# Altium PCB SPACER_2.PcbDoc
Units mm, origin at the board's own origin, x right, y up, seen from the top; angles counter-clockwise.
Board outline 22 x 22 mm, 2 copper layers (Top Layer, Bottom Layer), stack 1.571 mm thick; 1 components, 4 nets, 22 pads, 0 vias.
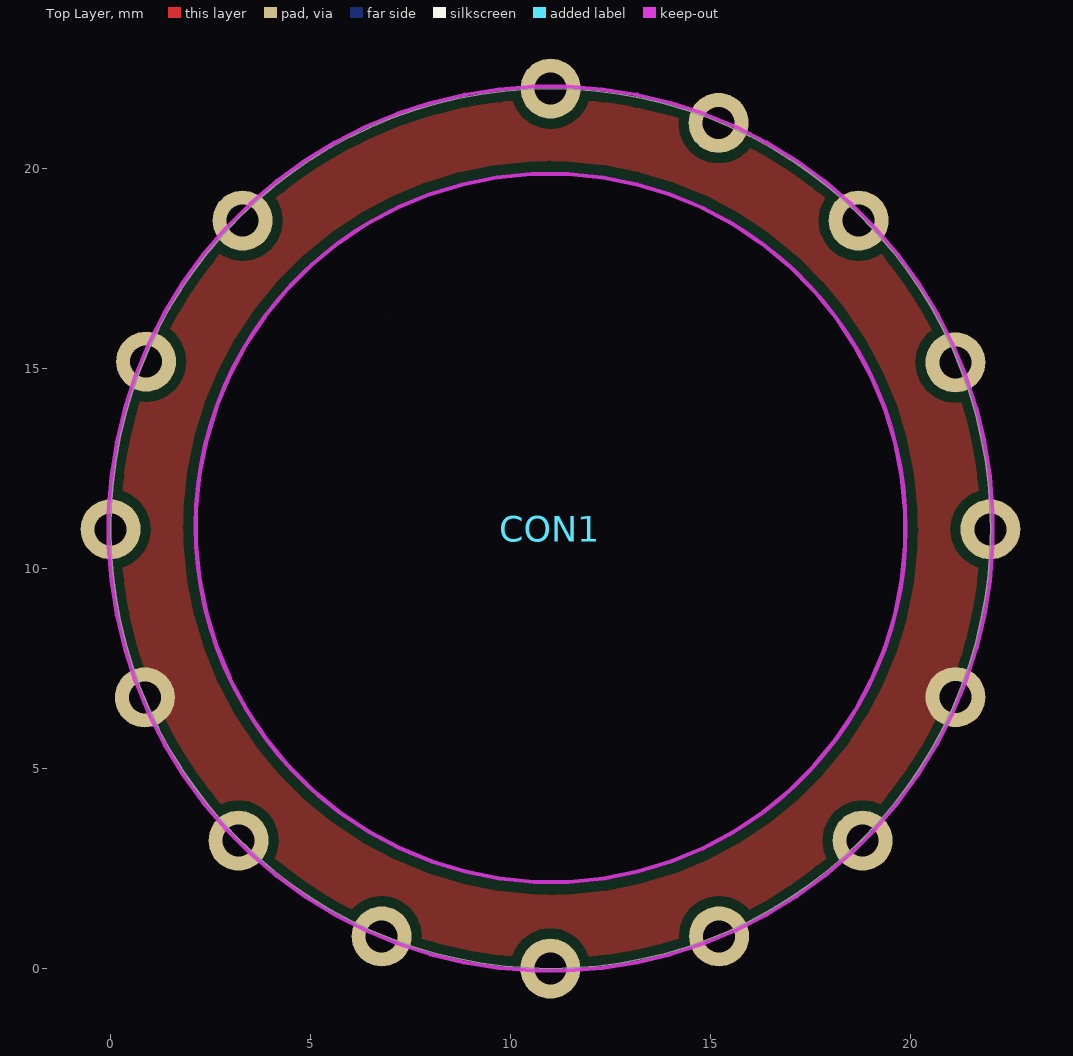
[diagram p0: Top Layer view]
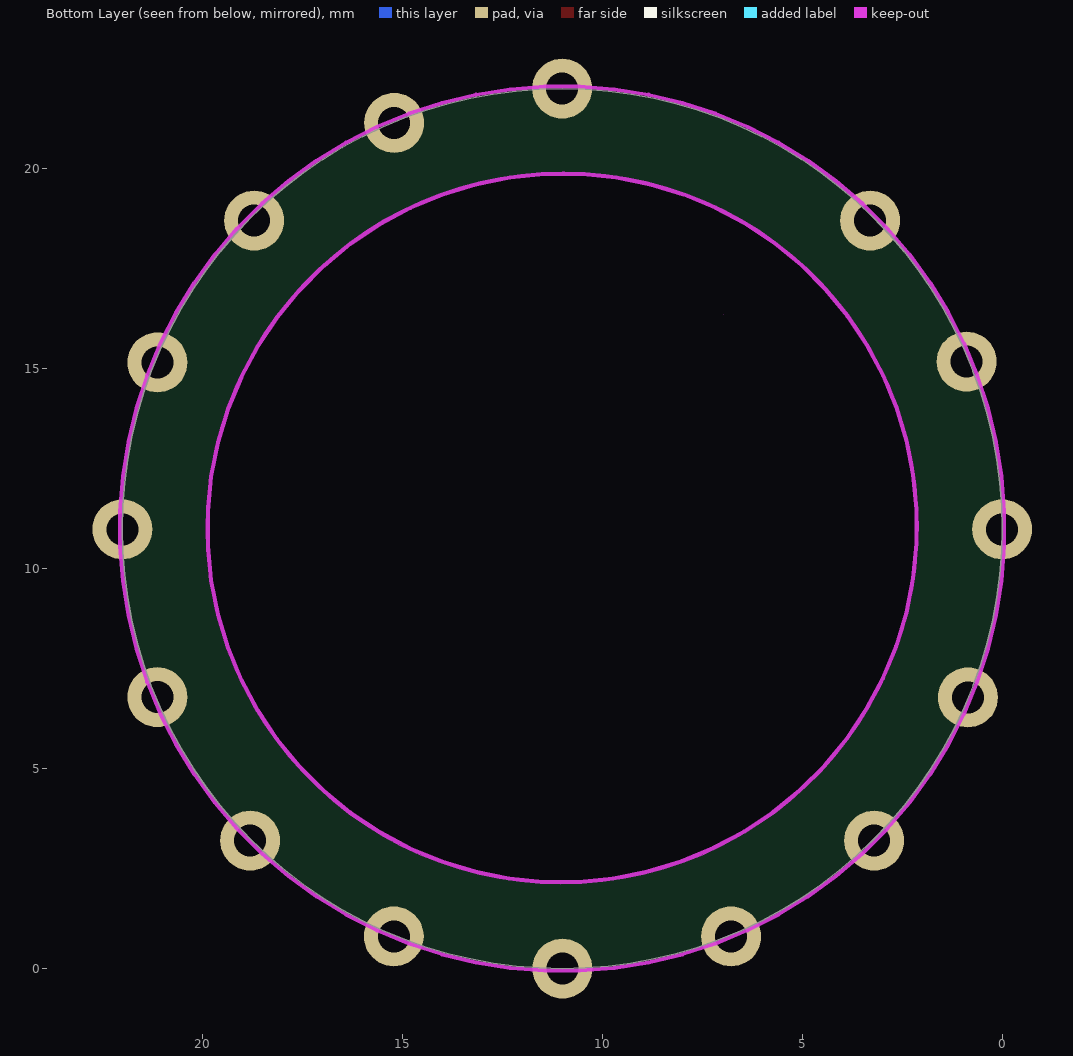
[diagram p1: Bottom Layer view, seen from below]

## Layer stack, top to bottom
Top Solder: solder mask 0.0102, Solder Resist, Dk 3.5
Top Layer: signal copper 0.0356
Dielectric 1: dielectric 1.5, FR-4, Dk 4.8
Bottom Layer: signal copper 0.0356
Bottom Solder: solder mask 0.0102, Solder Resist, Dk 3.5

## Board outline
11,0 cw(c11,11) 0,11 cw(c11,11) 11,22 cw(c11,11) 22,11 cw(c11,11)
cut-out: 11,19.91 cw(c11,11) 19.91,11 cw(c11.03,11) 11.03,2.12 cw(c11.03,11.06) 2.09,11.06 cw(c10.94,11.06) 10.94,19.91
cut-out: 6.97,16.34

## Design rules (kind name [scope] priority, off if disabled: settings)
Clearance [All] p1: gap=0.254 ignorepadtopadclearanceinfootprint=FALSE except(0: Arc-Hole Track-Hole SMDPad-Hole THPad-Hole Via-Hole Fill-Hole Poly-Hole Region-Hole Text-Hole)
PolygonConnect [All] p1: connectstyle=Direct reliefconductorwidth=0.254 reliefentries=4 polygonreliefangle="90 Angle" airgapwidth=0.254
RoutingVias [All] p1: holewidth=0.711 width=1.27 viastyle="Through Hole" minholewidth=0.711 minwidth=1.27 maxholewidth=0.711 maxwidth=1.27
SolderMaskExpansion [All] p1: expansion=0.102
Width [All] p1: maxlimit=0.254 minlimit=0.254 preferedwidth=0.254
30 further rules are at their usual default settings.

## Components (designator, comment, footprint, x,y, rotation, side; value= is the part's Value field where it differs from the comment)
CON1 "Between PCB connection" SmartParks_Rhino 11,11 r0 top locked

## Footprints (in the part's own frame and the unit in brackets; to place one, negate y for a bottom-side part, rotate by r counter-clockwise, add the part's x,y. Pads: shape width x height; smd on the part's side, far side on the other; paste and mask are expansions set on the pad)
SmartParks_Rhino [mm]
  round 1.5 hole 0.8: 1(0,11) 2(4.199,10.142) 3(7.7,7.7) 4(10.119,4.153) 5(10.993,-0.017) 6(10.122,-4.212) 7(7.8,-7.8) 8(4.211,-10.193) 9(-0.007,-11) 10(-4.222,-10.197) 11(-7.8,-7.8) 12(-10.143,-4.22) 13(-11,-0.017) 14(-10.11,4.176) 15(-7.7,7.7)

## Part data
CON1: library part SmartParks_Rhino

## Free pads (board coordinates)
  round 0.25 hole 0.8 unplated: 16(4.04,1.5) 16(4.967,0.9) 16(5.047,21.097) 16(22.37,7.99) 16(22.64,9.1) 17(6.025,21.607) 18(6.997,22.027)

## Nets (pads, with @x,y where several pads share a name; then routed paths per layer and width w, separated by ;. In a path a pad name is that pad's centre, name@x,y a point inside that pad or via, vN(x,y) a via of type N, cw(c..) or ccw(c..) an arc to the next point about the centre after c; other vN are vias at no path point)
GND: CON1.6 CON1.12
VBAT: CON1.14
VGPS: CON1.13
VMCU: CON1.5
pads on no net: CON1.1 CON1.2 CON1.3 CON1.4 CON1.7 CON1.8 CON1.9 CON1.10 CON1.11 CON1.15

## Polygon pours and split planes (outlines as drawn)
GND on Top Layer "Top Layer-GND" (solid, pour order 0): 11,22 cw(c11,11.007) 21.993,11.007 cw(c10.986,11.007) 10.986,0 cw(c10.986,10.986) 0,10.986 0,11 cw(c11,11)

## Keep-outs
Keep-Out Layer:
  lines w0.1: -0.05,10.564 cw(c0,10.568) -0.05,10.568 ; -0.05,10.564 -0.05,10.564 cw(c0,10.568) -0.05,10.568 ; -0.05,10.564 0.018,9.702 ; -0.05,10.568 -0.05,11 -0.05,11.432 ; -0.05,11.432 cw(c0,11.432) -0.05,11.436 ; -0.05,11.432 cw(c0,11.432) -0.05,11.436 -0.05,11.436 ; -0.05,11.436 0.018,12.298 ; 0.018,9.702 ccw(c0.068,9.706) 0.018,9.698 ; 0.018,9.702 ccw(c0.068,9.706) 0.018,9.698 ; 0.018,9.702 0.018,9.702 ; 0.018,12.298 cw(c0.068,12.294) 0.018,12.302 ; 0.018,12.298 cw(c0.068,12.294) 0.018,12.302 ; 0.018,12.298 0.018,12.298 ; 0.018,9.698 0.154,8.845 ; 0.018,12.302 0.154,13.155 ; 0.154,8.845 ccw(c0.203,8.852) 0.154,8.841 ; 0.154,8.845 ccw(c0.203,8.852) 0.154,8.841 ; 0.154,13.155 cw(c0.203,13.148) 0.154,13.159 ; 0.154,13.155 cw(c0.203,13.148) 0.154,13.159 ; 0.154,8.841 0.356,8 ; 0.154,13.159 0.356,14 ; 0.357,7.997 ccw(c0.405,8.012) 0.357,7.996 ; 0.357,7.997 cw(c0.405,8.012) 0.356,8 ; 0.357,7.997 0.357,7.996 ; 0.356,8 ccw(c0.405,8.012) 0.357,7.996 ; 0.356,14 cw(c0.405,13.988) 0.357,14.003 ; 0.356,14 cw(c0.405,13.988) 0.357,14.004 ; 0.357,14.003 cw(c0.405,13.988) 0.357,14.004 ; 0.357,14.003 0.357,14.004 ; 0.357,7.996 0.357,7.996 ; 0.357,7.996 0.624,7.174 ; 0.357,14.004 0.624,14.826 ; 0.357,14.004 0.357,14.004 ; 0.624,7.174 ccw(c0.672,7.19) 0.626,7.171 ; 0.624,7.174 ccw(c0.672,7.19) 0.624,7.174 ; 0.624,7.174 ccw(c0.672,7.19) 0.626,7.171 ; 0.624,7.174 0.624,7.174 ; 0.624,7.174 0.624,7.174 ; 0.624,14.826 cw(c0.672,14.81) 0.626,14.829 ; 0.624,14.826 ccw(c0.672,14.81) 0.624,14.826 ; 0.624,14.826 cw(c0.672,14.81) 0.626,14.829 ; 0.624,14.826 0.624,14.826 ; 0.624,14.826 0.624,14.826 ; 0.626,7.171 0.956,6.372 ; 0.626,14.829 0.956,15.628 ; 0.956,6.372 ccw(c1.003,6.391) 0.958,6.368 ; 0.956,6.372 ccw(c1.003,6.391) 0.958,6.368 ; 0.956,15.628 cw(c1.003,15.609) 0.958,15.632 ; 0.956,15.628 cw(c1.003,15.609) 0.958,15.632 ; 0.958,6.368 0.958,6.368 ; 0.958,6.368 1.35,5.599 ; 0.958,15.632 1.35,16.401 ; 0.958,15.632 0.958,15.632 ; 1.351,5.598 ccw(c1.395,5.621) 1.352,5.595 ; 1.35,5.599 ccw(c1.395,5.621) 1.352,5.595 ; 1.35,5.599 1.351,5.598 ; 1.351,16.402 cw(c1.395,16.379) 1.352,16.405 ; 1.35,16.401 cw(c1.395,16.379) 1.352,16.405 ; 1.35,16.401 1.351,16.402 ; 1.352,5.595 1.804,4.858 ; 1.352,16.405 1.804,17.142 ; 1.804,4.858 ccw(c1.847,4.884) 1.806,4.855 ; 1.804,4.858 ccw(c1.847,4.884) 1.806,4.855 ; 1.804,17.142 cw(c1.847,17.116) 1.806,17.145 ; 1.804,17.142 cw(c1.847,17.116) 1.806,17.145 ; 1.806,4.855 2.314,4.155 ; 1.806,17.145 2.314,17.845 ; 2.14,11.06 ccw(c2.09,11.06) 2.14,11.06 ; 2.14,11.06 ccw(c2.09,11.06) 2.14,11.06 ; 2.14,11.06 ccw(c2.09,11.06) 2.14,11.06 ; 2.14,11.06 ccw(c2.09,11.06) 2.14,11.06 ; 2.14,11.06 2.14,11.492 2.225,12.353 2.393,13.201 2.644,14.028 2.975,14.827 3.383,15.59 3.863,16.308 4.412,16.977 5.023,17.588 5.692,18.137 6.41,18.617 7.173,19.025 7.972,19.356 8.799,19.607 9.647,19.775 10.508,19.86 10.94,19.86 ; 2.14,11.06 2.14,11.06 ; 2.14,11.06 2.14,10.623 2.226,9.754 2.396,8.897 2.65,8.061 2.984,7.254 3.396,6.484 3.881,5.758 4.435,5.083 5.053,4.465 5.728,3.911 6.454,3.426 7.224,3.014 8.031,2.68 8.867,2.426 9.724,2.256 10.593,2.17 11.03,2.17 ; 2.14,11.06 2.14,11.06 ; 2.314,4.155 ccw(c2.355,4.185) 2.317,4.152 ; 2.314,4.155 ccw(c2.355,4.185) 2.317,4.152 ; 2.314,17.845 cw(c2.355,17.815) 2.317,17.848 ; 2.314,17.845 cw(c2.355,17.815) 2.317,17.848 ; 2.317,4.152 ccw(c2.355,4.185) 2.317,4.152 ; 2.317,4.152 2.317,4.152 ; 2.317,4.152 2.317,4.152 ; 2.317,17.848 cw(c2.355,17.815) 2.317,17.848 ; 2.317,17.848 2.317,17.848 ; 2.317,17.848 2.317,17.848 ; 2.317,4.152 2.878,3.495 ; 2.317,17.848 2.878,18.505 ; 2.878,3.495 ccw(c2.916,3.527) 2.878,3.495 ; 2.878,3.495 2.878,3.495 ; 2.878,18.505 cw(c2.916,18.473) 2.878,18.505 ; 2.878,18.505 2.878,18.505 ; 2.878,3.495 ccw(c2.916,3.527) 2.881,3.492 ; 2.878,3.495 2.878,3.495 ; 2.878,3.495 ccw(c2.916,3.527) 2.881,3.492 ; 2.878,18.505 cw(c2.916,18.473) 2.881,18.508 ; 2.878,18.505 2.878,18.505 ; 2.878,18.505 cw(c2.916,18.473) 2.881,18.508 ; 2.881,3.492 2.881,3.492 ; 2.881,3.492 3.492,2.881 ; 2.881,18.508 3.492,19.119 ; 2.881,18.508 2.881,18.508 ; 3.492,2.881 ccw(c3.527,2.916) 3.495,2.878 ; 3.492,2.881 ccw(c3.527,2.916) 3.495,2.878 ; 3.492,2.881 3.492,2.881 ; 3.492,19.119 cw(c3.527,19.084) 3.495,19.122 ; 3.492,19.119 cw(c3.527,19.084) 3.495,19.122 ; 3.492,19.119 3.492,19.119 ; 3.495,2.878 ccw(c3.527,2.916) 3.495,2.878 ; 3.495,2.878 4.152,2.317 ; 3.495,2.878 3.495,2.878 ; 3.495,2.878 3.495,2.878 ; 3.495,19.122 ccw(c3.527,19.084) 3.495,19.122 ; 3.495,19.122 4.152,19.683 ; 3.495,19.122 3.495,19.122 ; 3.495,19.122 3.495,19.122 ; 4.152,2.317 ccw(c4.185,2.355) 4.155,2.314 ; 4.152,2.317 ccw(c4.185,2.355) 4.152,2.317 ; 4.152,2.317 ccw(c4.185,2.355) 4.155,2.314 ; 4.152,2.317 4.152,2.317 ; 4.152,2.317 4.152,2.317 ; 4.152,19.683 cw(c4.185,19.645) 4.155,19.686 ; 4.152,19.683 ccw(c4.185,19.645) 4.152,19.683 ; 4.152,19.683 cw(c4.185,19.645) 4.155,19.686 ; 4.152,19.683 4.152,19.683 ; 4.152,19.683 4.152,19.683 ; 4.155,2.314 4.855,1.806 ; 4.155,19.686 4.855,20.194 ; 4.855,1.806 ccw(c4.884,1.847) 4.858,1.804 ; 4.855,1.806 ccw(c4.884,1.847) 4.858,1.804 ; 4.855,20.194 cw(c4.884,20.153) 4.858,20.196 ; 4.855,20.194 cw(c4.884,20.153) 4.858,20.196 ; 4.858,1.804 5.595,1.352 ; 4.858,20.196 5.595,20.648 ; 5.595,1.352 ccw(c5.621,1.395) 5.599,1.35 ; 5.595,1.352 ccw(c5.621,1.395) 5.598,1.351 5.599,1.35 ; 5.595,20.648 cw(c5.621,20.605) 5.599,20.65 ; 5.595,20.648 cw(c5.621,20.605) 5.598,20.649 5.599,20.65 ; 5.599,1.35 6.368,0.958 ; 5.599,20.65 6.368,21.042 ; 6.368,0.958 ccw(c6.391,1.003) 6.372,0.956 ; 6.368,0.958 ccw(c6.391,1.003) 6.372,0.956 ; 6.368,0.958 6.368,0.958 ; 6.368,21.042 cw(c6.391,20.997) 6.372,21.044 ; 6.368,21.042 cw(c6.391,20.997) 6.372,21.044 ; 6.368,21.042 6.368,21.042 ; 6.372,0.956 7.171,0.626 ; 6.372,21.044 7.171,21.374 ; 7.171,0.626 ccw(c7.19,0.672) 7.174,0.624 ; 7.171,0.626 ccw(c7.19,0.672) 7.174,0.624 ; 7.171,21.374 cw(c7.19,21.328) 7.174,21.376 ; 7.171,21.374 cw(c7.19,21.328) 7.174,21.376 ; 7.174,0.624 ccw(c7.19,0.672) 7.174,0.624 ; 7.174,0.624 7.996,0.357 ; 7.174,0.624 7.174,0.624 ; 7.174,0.624 7.174,0.624 ; 7.174,21.376 ccw(c7.19,21.328) 7.174,21.376 ; 7.174,21.376 7.996,21.643 ; 7.174,21.376 7.174,21.376 ; 7.174,21.376 7.174,21.376 ; 7.996,0.357 ccw(c8.012,0.405) 7.997,0.357 ; 7.996,0.357 7.996,0.357 ; 7.996,21.643 cw(c8.012,21.595) 7.997,21.643 ; 7.996,21.643 7.996,21.643 ; 7.997,0.357 ccw(c8.012,0.405) 8,0.356 ; 7.996,0.357 ccw(c8.012,0.405) 8,0.356 ; 7.996,0.357 7.997,0.357 ; 7.996,21.643 cw(c8.012,21.595) 8,21.644 ; 7.997,21.643 cw(c8.012,21.595) 8,21.644 ; 7.996,21.643 7.997,21.643 ; 8,0.356 8.841,0.154 ; 8,21.644 8.841,21.846 ; 8.841,0.154 ccw(c8.852,0.203) 8.845,0.154 ; 8.841,0.154 ccw(c8.852,0.203) 8.845,0.154 ; 8.841,21.846 cw(c8.852,21.797) 8.845,21.846 ; 8.841,21.846 cw(c8.852,21.797) 8.845,21.846 ; 8.845,0.154 9.698,0.018 ; 8.845,21.846 9.698,21.982 ; 9.698,0.018 ccw(c9.706,0.068) 9.702,0.018 ; 9.698,0.018 ccw(c9.706,0.068) 9.702,0.018 ; 9.698,21.982 cw(c9.706,21.932) 9.702,21.982 ; 9.698,21.982 cw(c9.706,21.932) 9.702,21.982 ; 9.702,0.018 10.564,-0.05 ; 9.702,0.018 9.702,0.018 ; 9.702,21.982 10.564,22.05 ; 9.702,21.982 9.702,21.982 ; 10.564,-0.05 ccw(c10.568,0) 10.568,-0.05 ; 10.564,-0.05 ccw(c10.568,0) 10.568,-0.05 ; 10.564,-0.05 10.564,-0.05 ; 10.564,22.05 cw(c10.568,22) 10.568,22.05 ; 10.564,22.05 cw(c10.568,22) 10.568,22.05 ; 10.564,22.05 10.564,22.05 ; 10.568,-0.05 11.432,-0.05 ; 10.568,22.05 11.432,22.05 ; 10.94,19.86 ccw(c10.94,19.91) 10.941,19.86 ; 10.94,19.86 ccw(c10.94,19.91) 10.941,19.86 ; 10.94,19.86 10.941,19.86 ; 10.941,19.86 11,19.86 ; 11,19.86 ccw(c11,19.91) 11,19.86 ; 11,19.86 ccw(c11,19.91) 11,19.86 ; 11,19.86 11.435,19.86 12.302,19.775 13.155,19.605 13.988,19.352 14.793,19.019 15.56,18.609 16.284,18.125 16.957,17.573 17.573,16.957 18.125,16.284 18.609,15.56 19.019,14.793 19.352,13.988 19.605,13.155 19.775,12.302 19.86,11.435 19.86,11 ; 11.03,2.17 ccw(c11.03,2.12) 11.03,2.17 ; 11.03,2.17 ccw(c11.03,2.12) 11.03,2.17 ; 11.03,2.17 ccw(c11.03,2.12) 11.03,2.17 ; 11.03,2.17 ccw(c11.03,2.12) 11.03,2.17 ; 11.03,2.17 11.03,2.17 ; 11.03,2.17 11.03,2.17 ; 11.03,2.17 11.03,2.17 ; 11.03,2.17 11.03,2.17 ; 11.03,2.17 11.464,2.17 12.327,2.255 13.178,2.424 14.008,2.676 14.81,3.008 15.575,3.417 16.296,3.899 16.967,4.45 17.58,5.063 18.131,5.734 18.613,6.455 19.022,7.22 19.354,8.022 19.606,8.852 19.775,9.703 19.86,10.566 19.86,10.999 ; 11.03,2.17 11.03,2.17 ; 11.03,2.17 11.03,2.17 ; 11.432,-0.05 ccw(c11.432,0) 11.436,-0.05 ; 11.432,-0.05 ccw(c11.432,0) 11.436,-0.05 ; 11.432,22.05 cw(c11.432,22) 11.436,22.05 ; 11.432,22.05 cw(c11.432,22) 11.436,22.05 ; 11.436,-0.05 12.298,0.018 ; 11.436,-0.05 11.436,-0.05 ; 11.436,22.05 12.298,21.982 ; 11.436,22.05 11.436,22.05 ; 12.298,0.018 ccw(c12.294,0.068) 12.302,0.018 ; 12.298,0.018 12.298,0.018 ccw(c12.294,0.068) 12.302,0.018 ; 12.298,21.982 cw(c12.294,21.932) 12.302,21.982 ; 12.298,21.982 12.298,21.982 cw(c12.294,21.932) 12.302,21.982 ; 12.302,0.018 13.155,0.154 ; 12.302,21.982 13.155,21.846 ; 13.155,0.154 ccw(c13.148,0.203) 13.159,0.154 ; 13.155,0.154 ccw(c13.148,0.203) 13.159,0.154 ; 13.155,21.846 cw(c13.148,21.797) 13.159,21.846 ; 13.155,21.846 cw(c13.148,21.797) 13.159,21.846 ; 13.159,0.154 14,0.356 ; 13.159,21.846 14,21.644 ; 14,0.356 ccw(c13.988,0.405) 14.003,0.357 ; 14,0.356 ccw(c13.988,0.405) 14.004,0.357 ; 14,21.644 cw(c13.988,21.595) 14.003,21.643 ; 14,21.644 cw(c13.988,21.595) 14.004,21.643 ; 14.003,0.357 ccw(c13.988,0.405) 14.004,0.357 ; 14.004,0.357 14.826,0.624 ; 14.004,0.357 14.004,0.357 ; 14.003,0.357 14.004,0.357 ; 14.004,21.643 ccw(c13.988,21.595) 14.003,21.643 ; 14.004,21.643 14.826,21.376 ; 14.004,21.643 14.004,21.643 ; 14.003,21.643 14.004,21.643 ; 14.826,0.624 ccw(c14.81,0.672) 14.829,0.626 ; 14.826,0.624 ccw(c14.81,0.672) 14.829,0.626 ; 14.826,0.624 ccw(c14.81,0.672) 14.826,0.624 ; 14.826,0.624 14.826,0.624 ; 14.826,0.624 14.826,0.624 ; 14.826,21.376 cw(c14.81,21.328) 14.829,21.374 ; 14.826,21.376 ccw(c14.81,21.328) 14.826,21.376 ; 14.826,21.376 cw(c14.81,21.328) 14.829,21.374 ; 14.826,21.376 14.826,21.376 ; 14.826,21.376 14.826,21.376 ; 14.829,0.626 15.628,0.956 ; 14.829,21.374 15.628,21.044 ; 15.628,0.956 ccw(c15.609,1.003) 15.632,0.958 ; 15.628,0.956 ccw(c15.609,1.003) 15.632,0.958 ; 15.628,21.044 cw(c15.609,20.997) 15.632,21.042 ; 15.628,21.044 cw(c15.609,20.997) 15.632,21.042 ; 15.632,0.958 16.401,1.35 ; 15.632,0.958 15.632,0.958 ; 15.632,21.042 16.401,20.65 ; 15.632,21.042 15.632,21.042 ; 16.402,1.351 ccw(c16.379,1.395) 16.405,1.352 ; 16.401,1.35 ccw(c16.379,1.395) 16.405,1.352 ; 16.401,1.35 16.402,1.351 ; 16.401,20.65 cw(c16.379,20.605) 16.405,20.648 ; 16.402,20.649 cw(c16.379,20.605) 16.405,20.648 ; 16.401,20.65 16.402,20.649 ; 16.405,1.352 17.142,1.804 ; 16.405,20.648 17.142,20.196 ; 17.142,1.804 ccw(c17.116,1.847) 17.145,1.806 ; 17.142,1.804 ccw(c17.116,1.847) 17.145,1.806 ; 17.142,20.196 cw(c17.116,20.153) 17.145,20.194 ; 17.142,20.196 cw(c17.116,20.153) 17.145,20.194 ; 17.145,1.806 17.845,2.314 ; 17.145,20.194 17.845,19.686 ; 17.845,2.314 ccw(c17.815,2.355) 17.848,2.317 ; 17.845,2.314 ccw(c17.815,2.355) 17.848,2.317 ; 17.845,19.686 cw(c17.815,19.645) 17.848,19.683 ; 17.845,19.686 cw(c17.815,19.645) 17.848,19.683 ; 17.848,2.317 ccw(c17.815,2.355) 17.848,2.317 ; 17.848,2.317 18.505,2.878 ; 17.848,2.317 17.848,2.317 ; 17.848,2.317 17.848,2.317 ; 17.848,19.683 ccw(c17.815,19.645) 17.848,19.683 ; 17.848,19.683 18.505,19.122 ; 17.848,19.683 17.848,19.683 ; 17.848,19.683 17.848,19.683 ; 18.505,2.878 ccw(c18.473,2.916) 18.508,2.881 ; 18.505,2.878 ccw(c18.473,2.916) 18.508,2.881 18.508,2.881 ; 18.505,2.878 ccw(c18.473,2.916) 18.505,2.878 ; 18.505,2.878 18.505,2.878 ; 18.505,2.878 18.505,2.878 ; 18.505,19.122 cw(c18.473,19.084) 18.508,19.119 ; 18.505,19.122 ccw(c18.473,19.084) 18.505,19.122 ; 18.505,19.122 cw(c18.473,19.084) 18.508,19.119 18.508,19.119 ; 18.505,19.122 18.505,19.122 ; 18.505,19.122 18.505,19.122 ; 18.508,2.881 19.119,3.492 ; 18.508,19.119 19.119,18.508 ; 19.119,3.492 ccw(c19.084,3.527) 19.122,3.495 ; 19.119,3.492 19.119,3.492 ccw(c19.084,3.527) 19.122,3.495 ; 19.119,18.508 cw(c19.084,18.473) 19.122,18.505 ; 19.119,18.508 19.119,18.508 cw(c19.084,18.473) 19.122,18.505 ; 19.122,3.495 ccw(c19.084,3.527) 19.122,3.495 ; 19.122,3.495 19.122,3.495 ; 19.122,3.495 19.683,4.152 ; 19.122,3.495 19.122,3.495 ; 19.122,18.505 ccw(c19.084,18.473) 19.122,18.505 ; 19.122,18.505 19.122,18.505 ; 19.122,18.505 19.122,18.505 ; 19.122,18.505 19.683,17.848 ; 19.683,4.152 ccw(c19.645,4.185) 19.686,4.155 ; 19.683,4.152 ccw(c19.645,4.185) 19.686,4.155 ; 19.683,4.152 ccw(c19.645,4.185) 19.683,4.152 ; 19.683,4.152 19.683,4.152 ; 19.683,4.152 19.683,4.152 ; 19.683,17.848 cw(c19.645,17.815) 19.686,17.845 ; 19.683,17.848 ccw(c19.645,17.815) 19.683,17.848 ; 19.683,17.848 cw(c19.645,17.815) 19.686,17.845 ; 19.683,17.848 19.683,17.848 ; 19.683,17.848 19.683,17.848 ; 19.686,4.155 20.194,4.855 ; 19.686,17.845 20.194,17.145 ; 19.86,10.999 cw(c19.91,11) 19.86,11 ; 19.86,10.999 cw(c19.91,11) 19.86,11 ; 19.86,10.999 19.86,11 ; 20.194,4.855 ccw(c20.153,4.884) 20.196,4.858 ; 20.194,4.855 ccw(c20.153,4.884) 20.196,4.858 ; 20.194,17.145 cw(c20.153,17.116) 20.196,17.142 ; 20.194,17.145 cw(c20.153,17.116) 20.196,17.142 ; 20.196,4.858 20.648,5.595 ; 20.196,17.142 20.648,16.405 ; 20.648,5.595 ccw(c20.605,5.621) 20.65,5.599 ; 20.648,5.595 ccw(c20.605,5.621) 20.649,5.598 ; 20.648,16.405 cw(c20.605,16.379) 20.649,16.402 ; 20.648,16.405 cw(c20.605,16.379) 20.65,16.401 ; 20.65,5.599 21.042,6.368 ; 20.649,5.598 20.65,5.599 ; 20.649,16.402 20.65,16.401 ; 20.65,16.401 21.042,15.632 ; 21.042,6.368 ccw(c20.997,6.391) 21.044,6.372 ; 21.042,6.368 21.042,6.368 ccw(c20.997,6.391) 21.044,6.372 ; 21.042,15.632 cw(c20.997,15.609) 21.044,15.628 ; 21.042,15.632 21.042,15.632 cw(c20.997,15.609) 21.044,15.628 ; 21.044,6.372 21.374,7.171 ; 21.044,15.628 21.374,14.829 ; 21.374,7.171 ccw(c21.328,7.19) 21.376,7.174 ; 21.374,7.171 ccw(c21.328,7.19) 21.376,7.174 ; 21.374,14.829 cw(c21.328,14.81) 21.376,14.826 ; 21.374,14.829 cw(c21.328,14.81) 21.376,14.826 ; 21.376,7.174 ccw(c21.328,7.19) 21.376,7.174 ; 21.376,7.174 21.643,7.996 ; 21.376,7.174 21.376,7.174 ; 21.376,7.174 21.376,7.174 ; 21.376,14.826 ccw(c21.328,14.81) 21.376,14.826 ; 21.376,14.826 21.376,14.826 ; 21.376,14.826 21.376,14.826 ; 21.376,14.826 21.643,14.004 ; 21.643,7.996 ccw(c21.595,8.012) 21.644,8 ; 21.643,7.997 ccw(c21.595,8.012) 21.644,8 ; 21.643,7.996 ccw(c21.595,8.012) 21.643,7.997 ; 21.643,7.996 21.643,7.997 ; 21.643,7.996 21.643,7.996 ; 21.643,14.003 ccw(c21.595,13.988) 21.643,14.004 ; 21.643,14.003 cw(c21.595,13.988) 21.644,14 ; 21.643,14.004 cw(c21.595,13.988) 21.644,14 ; 21.643,14.004 21.643,14.004 ; 21.643,14.004 21.643,14.003 ; 21.644,8 21.846,8.841 ; 21.644,14 21.846,13.159 ; 21.846,8.841 ccw(c21.797,8.852) 21.846,8.845 ; 21.846,8.841 ccw(c21.797,8.852) 21.846,8.845 ; 21.846,13.159 cw(c21.797,13.148) 21.846,13.155 ; 21.846,13.159 cw(c21.797,13.148) 21.846,13.155 ; 21.846,8.845 21.982,9.698 ; 21.846,13.155 21.982,12.302 ; 21.982,9.698 ccw(c21.932,9.706) 21.982,9.702 ; 21.982,9.698 ccw(c21.932,9.706) 21.982,9.702 ; 21.982,9.702 22.05,10.564 ; 21.982,9.702 21.982,9.702 ; 21.982,12.298 ccw(c21.932,12.294) 21.982,12.302 ; 21.982,12.298 ccw(c21.932,12.294) 21.982,12.302 ; 21.982,12.298 21.982,12.298 ; 21.982,12.298 22.05,11.436 ; 22.05,10.564 ccw(c22,10.568) 22.05,10.568 ; 22.05,10.564 22.05,10.564 ccw(c22,10.568) 22.05,10.568 ; 22.05,10.568 22.05,11 22.05,11.432 ; 22.05,11.432 ccw(c22,11.432) 22.05,11.436 22.05,11.436 ; 22.05,11.432 ccw(c22,11.432) 22.05,11.436

## Silkscreen, mask and mechanical layers (free items; w line width, h text height)
Route Tool Path:
  lines w2: 3.117,1.976 cw(c11.007,11.017) 3.873,20.666 ; 5.706,0.251 ccw(c11.007,11.017) 22.301,6.96 ; 7.99,22.632 cw(c11.007,11.017) 23.007,11.017 cw(c11.007,11.017) 22.97,10.074